# EAGLE board bubbledisplaybackpack.v01.osh (EAGLE 6.4)
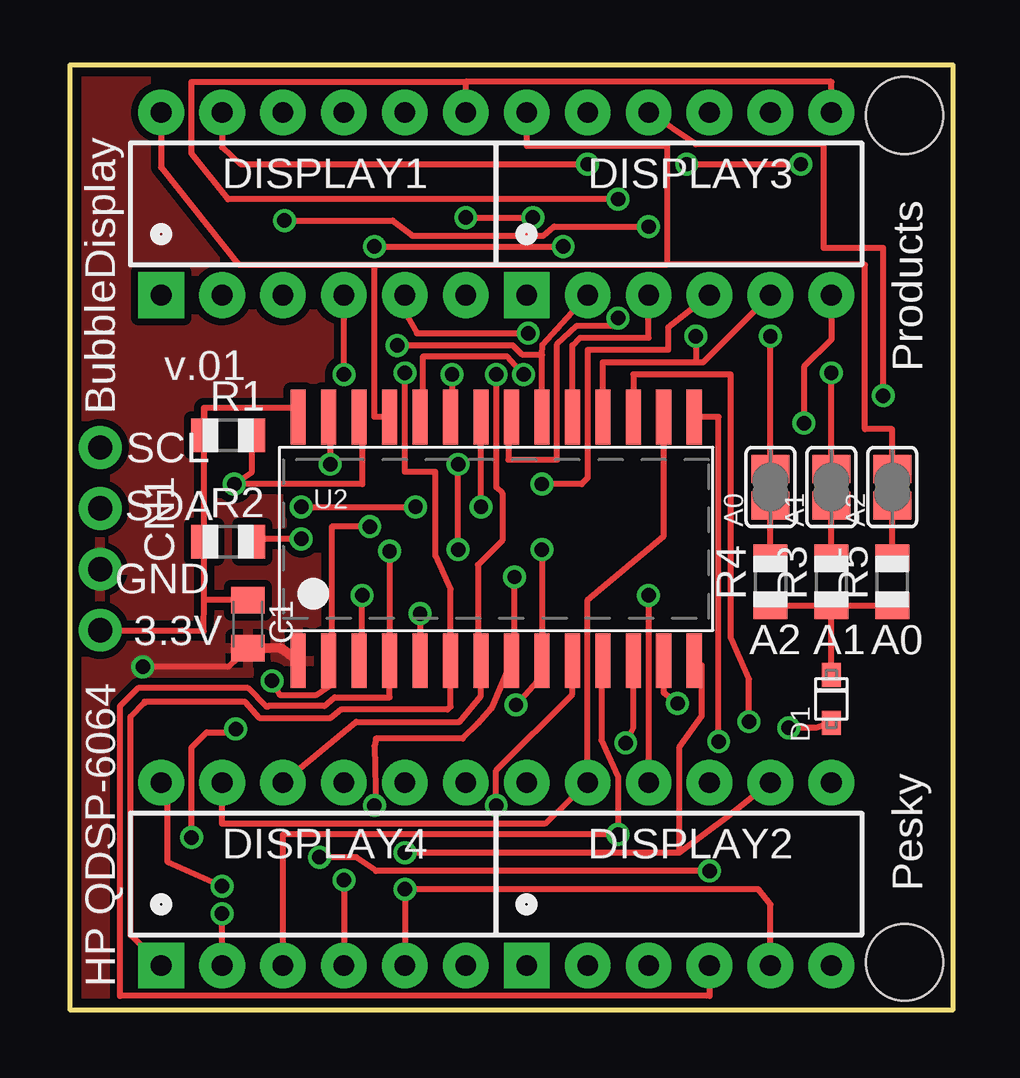
[diagram p0: board, top side]
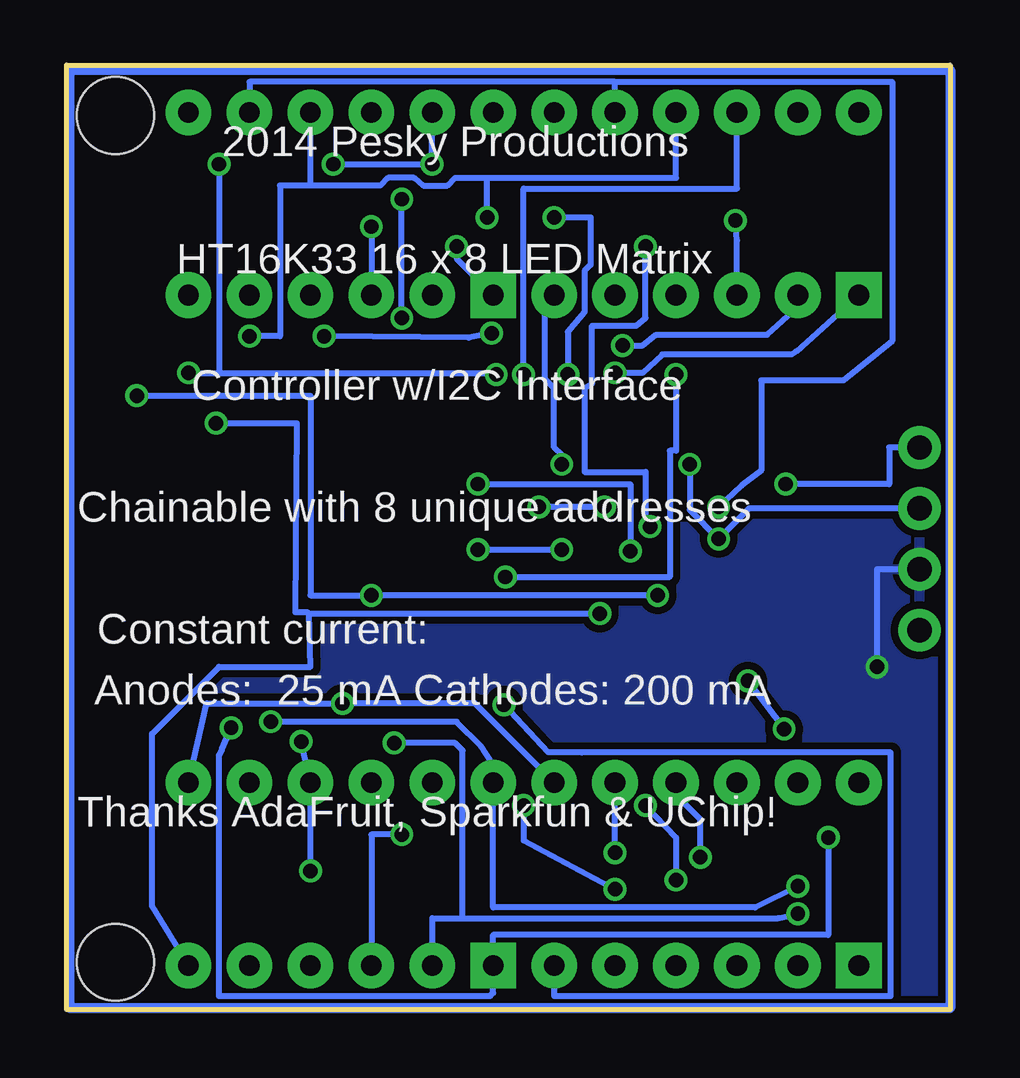
[diagram p1: board, bottom side, seen from below]

Size 36.83 x 39.37 mm. Coordinates in mm from the lower left corner, seen from the top.
Outline: 0,39.37 0,0 36.83,0 36.83,39.37 0,39.37
Copper layers (1*16): Top 0.0356mm / dielectric 1.5011mm / Bottom 0.0356mm
Design rules "OSHPark *": minimum track width 6mil, minimum drill 13mil, track to track 6mil, track to pad 6mil, pad to pad 6mil, via to via 6mil, smd to smd 6mil, copper to edge 15mil, drill to drill 6mil, minimum pad ring 7mil, minimum via ring 7mil, stop-mask expansion 3mil, vias tented up to drill 25mil, thermal gap 10mil
Holes 3.2 mm at 34.8,37.27 34.8,1.97

## Footprints (pad centres in the part's own frame; a part is rotated, then mirrored left to right if it is on the bottom)
SOLDERJUMPER_REFLOW_NOPASTE = smd 1.168 x 1.6: 1 -0.762,0; 2 0.762,0
C0805K = smd 1.1 x 1.4: 1 -1,0; 2 1,0
1X04-CLEANBIG = drill 1.016 pad 1.778: 1 -3.81,0; 2 -1.27,0; 3 1.27,0; 4 3.81,0
SOD-323F = smd 1 x 0.8: A -1,0; C 1,0
DIL12 = drill 0.864 pad 1.905 square: 1 -6.35,-3.81 | drill 0.864 pad 1.905: 2 -3.81,-3.81; 3 -1.27,-3.81; 4 1.27,-3.81; 5 3.81,-3.81; 6 6.35,-3.81; 7 6.35,3.81; 8 3.81,3.81; 9 1.27,3.81; 10 -1.27,3.81; 11 -3.81,3.81; 12 -6.35,3.81
R0805 = smd 1.1 x 1.4: 1 -1,0; 2 1,0
SOP28_300MIL = smd 0.635 x 2.286: P$1 -8.255,-5.08; P$2 -6.985,-5.08; P$3 -5.715,-5.08; P$4 -4.445,-5.08; P$5 -3.175,-5.08; P$6 -1.905,-5.08; P$7 -0.635,-5.08; P$8 0.635,-5.08; P$9 1.905,-5.08; P$10 3.175,-5.08; P$11 4.445,-5.08; P$12 5.715,-5.08; P$13 6.985,-5.08; P$14 8.255,-5.08; P$15 8.255,5.08; P$16 6.985,5.08; P$17 5.715,5.08; P$18 4.445,5.08; P$19 3.175,5.08; P$20 1.905,5.08; P$21 0.635,5.08; P$22 -0.635,5.08; P$23 -1.905,5.08; P$24 -3.175,5.08; P$25 -4.445,5.08; P$26 -5.715,5.08; P$27 -6.985,5.08; P$28 -8.255,5.08

## Placement (x,y rotation side)
A0  [SOLDERJUMPER_REFLOW_NOPASTE]  29.21,21.78 90 top
A1  [SOLDERJUMPER_REFLOW_NOPASTE]  31.75,21.78 90 top
A2  [SOLDERJUMPER_REFLOW_NOPASTE]  34.29,21.78 90 top
C1  10uF  [C0805K]  7.43,16.07 270 top
CN1  1X4-CLEANBIG  [1X04-CLEANBIG]  1.27,19.62 270 top
D1  1N4148  [SOD-323F]  31.75,12.95 90 top
DISPLAY1  hp  [DIL12]  10.16,33.59 0 top
DISPLAY2  hp  [DIL12]  25.4,5.65 0 top
DISPLAY3  hp  [DIL12]  25.4,33.59 0 top
DISPLAY4  hp  [DIL12]  10.16,5.65 0 top
FRAME1  FRAME-LEDGER  [CREATIVE_COMMONS]  -26.67,-7.62 0 top  (outside the outline)
R1  10K  [R0805]  6.6,23.94 0 top
R2  10K  [R0805]  6.6,19.49 0 top
R3  47K  [R0805]  31.75,17.84 90 top
R4  47K  [R0805]  29.21,17.84 90 top
R5  47K  [R0805]  34.29,17.84 90 top
U2  [SOP28_300MIL]  17.78,19.62 0 top

## Library data of the parts
A0 A1 A2 U2 = microbuilder
C1 CN1 D1 R1-R5 = adafruit
DISPLAY1-DISPLAY4 = SparkFun-Displays
FRAME1 = SparkFun-Aesthetics

## Nets
A0: A0.2 DISPLAY1.9 DISPLAY3.9 U2.P$23
A1: A1.2 DISPLAY1.11 DISPLAY3.11 U2.P$24
A2: A2.2 DISPLAY1.12 DISPLAY3.12 U2.P$25
C0P1: D1.A DISPLAY2.1 DISPLAY3.1 U2.P$2
C1P10: DISPLAY2.10 DISPLAY3.10 U2.P$3
C2P4: DISPLAY2.4 DISPLAY3.4 U2.P$4
C3P6: DISPLAY2.6 DISPLAY3.6 U2.P$5
C4P1: DISPLAY1.1 DISPLAY4.1 U2.P$6
C5P10: DISPLAY1.10 DISPLAY4.10 U2.P$7
C6P4: DISPLAY1.4 DISPLAY4.4 U2.P$8
C7P6: DISPLAY1.6 DISPLAY4.6 U2.P$9
GND: C1.2 CN1.3 U2.P$1
N$1: D1.C R3.1 R4.1 R5.1
N$3: DISPLAY1.8 DISPLAY3.8 U2.P$22
N$5: DISPLAY2.9 DISPLAY4.9 U2.P$15
N$7: A2.1 R5.2
N$8: DISPLAY2.2 DISPLAY4.2 U2.P$12
N$19: A1.1 R3.2
N$20: A0.1 R4.2
SCL: CN1.1 R1.2 U2.P$26
SDA: CN1.2 R2.2 U2.P$27
SEGAD24P12: DISPLAY2.12 DISPLAY4.12 U2.P$17
SEGBD24P11: DISPLAY2.11 DISPLAY4.11 U2.P$16
SEGCP3: DISPLAY2.3 DISPLAY4.3 U2.P$11
SEGD13EP2: DISPLAY1.7 DISPLAY3.7 U2.P$21
SEGD13GP7: DISPLAY1.3 DISPLAY3.3 U2.P$19
SEGDD24P8: DISPLAY2.8 DISPLAY4.8 U2.P$14
SEGDPD13P5: DISPLAY1.5 DISPLAY3.5 U2.P$18
SEGDPP5: DISPLAY2.5 DISPLAY4.5 U2.P$10
SEGED13P2: DISPLAY1.2 DISPLAY3.2 U2.P$20
SEGFP9: DISPLAY2.7 DISPLAY4.7 U2.P$13
VDD: C1.1 CN1.4 R1.1 R2.1 U2.P$28

## Tracks (layer width: path | path; a pad name or v marks a point on that pad's centre or on a via)
A0  (via drill 0.6)
  Top 0.254: A0.2 v29.21,28.07 | U2.P$23 16,24.7 v15.94,26.48 | v16.51,33.02 v19.3,33.02
  Bottom 0.254: 26.67,34.35 DISPLAY3.9 | DISPLAY1.9 11.43,34.67 19.3,34.67 | v16.51,33.02 14.99,33.02 14.99,31.05 15.24,30.8 15.24,29.08 15.94,28.26 v15.94,26.48 | v19.3,33.02 19.3,34.67 | 26.67,34.35 27.94,34.35 27.94,28.07 v29.21,28.07 | 19.3,34.67 20.64,34.67 20.95,34.35 21.97,34.35 22.35,34.67 23.43,34.67 23.75,34.35 26.67,34.35
A1  (via drill 0.6)
  Top 0.254: A1.2 v31.75,26.54 | U2.P$24 14.73,24.7 14.73,27.24 18.22,27.24 v18.92,26.48 | DISPLAY1.11 6.35,35.94 7.11,35.24 v21.59,35.24 | v25.72,35.24 v30.48,35.24
  Bottom 0.254: DISPLAY3.11 v21.59,35.24 v25.72,35.24 | v18.92,26.48 18.92,26.54 30.48,26.54 | v31.75,26.54 30.48,26.54 | v30.48,35.24 30.48,26.54
A2
  Top 0.254: 24.89,31.05 33.15,31.05 33.15,24.19 34.29,24.19 A2.2 | U2.P$25 12.7,24.7 12.7,31.05 | 12.7,31.05 24.89,31.05 | DISPLAY1.12 3.81,35.12 7.05,31.05 12.7,31.05 | DISPLAY3.12 19.05,36.01 24.89,36.01 24.89,31.05
C0P1  (via drill 0.6)
  Top 0.254: v12.51,20.13 10.92,20.13 10.92,15.3 10.79,15.18 U2.P$2 10.85,14.43 10.85,13.51 10.25,13.11 8.78,13.11 v8.43,13.7 | D1.A 31.11,11.75 v29.97,11.75 | v12.7,31.81 v20.57,31.81 | v5.08,7.18 5.08,10.92 5.71,11.56 6.78,11.56 v6.92,11.7
  Bottom 0.254: v8.43,13.7 v6.92,11.7 | v5.08,7.18 5.08,3.11 19.05,3.11 DISPLAY2.1 19.05,0.7 19.18,0.57 30.48,0.57 30.48,10.6 30.35,10.86 v29.97,11.75 | v12.51,20.13 12.7,20.13 12.7,22.42 15.24,22.42 15.24,25.91 14.92,26.1 14.92,28.51 13.08,28.51 12.7,28.83 v12.7,31.81 | v20.57,31.81 20.57,31.3 DISPLAY3.1
C1P10  (via drill 0.6)
  Top 0.254: v24.13,17.27 DISPLAY2.10 | DISPLAY3.10 26.1,36.07 31.43,36.07 31.43,31.75 33.91,31.75 v33.91,25.59 | U2.P$3 12.19,14.67 v12.19,17.27
  Bottom 0.254: v33.91,25.59 26.67,25.59 26.67,17.27 v24.13,17.27 v12.19,17.27
C2P4  (via drill 0.6)
  Top 0.254: v19.68,21.91 21.34,21.91 21.59,22.16 21.59,27.5 24.96,27.5 24.96,28.45 DISPLAY3.4 | v13.34,19.11 U2.P$4 13.34,13.02 11.05,13.02 10.62,12.65 8.27,12.65 8.26,12.64 8.19,12.64 7.43,13.4 2.85,13.4 2.1,12.65 2.1,0.57 26.67,0.57 DISPLAY2.4
  Bottom 0.254: v19.68,21.91 13.34,21.91 v13.34,19.11
C3P6  (via drill 0.6)
  Top 0.254: v14.61,16.51 U2.P$5 | DISPLAY3.6 31.75,27.94 30.61,26.8 v30.61,24.45
  Bottom 0.254: DISPLAY2.6 33.27,4.32 33.27,11.49 30.48,14.29 26.67,14.29 26.73,16.51 | 26.73,16.51 v14.61,16.51 | 26.73,16.51 26.8,16.57 27.3,16.57 27.24,24.45 v30.61,24.45
C4P1  (via drill 0.6)
  Top 0.254: v13.97,26.54 13.97,22.42 15.24,22.42 15.24,18.92 15.88,17.53 U2.P$6 15.88,12.64 15.75,12.51 11.3,12.51 10.86,12.14 7.92,12.14 7.3,12.83 3.11,12.83 3.11,12.78 2.54,12.21 2.54,3.11 DISPLAY4.1
  Bottom 0.254: DISPLAY1.1 6.41,27.43 6.6,27.3 12,27.3 12.83,26.54 v13.97,26.54
C5P10  (via drill 0.6)
  Top 0.254: DISPLAY4.10 11.94,12 16.26,12 17.14,13.08 U2.P$7 17.02,14.67 17.02,18.54 18.03,19.56 18.03,21.53 17.78,21.78 v17.78,26.48
  Bottom 0.254: v17.78,26.48 17.78,34.23 8.89,34.23 DISPLAY1.10
C6P4  (via drill 0.6)
  Top 0.254: v11.43,5.4 DISPLAY4.4 | v11.43,26.48 DISPLAY1.4 | v12.7,8.51 12.76,8.32 12.7,10.99 12.76,11.3 16.38,11.3 17.02,11.94 17.59,12.57 U2.P$8 18.54,14.67 v18.54,18.03
  Bottom 0.254: v12.7,8.51 11.43,7.18 v11.43,5.4 | v18.54,18.03 11.68,18.03 11.68,23.3 11.43,23.3 v11.43,26.48
C7P6  (via drill 0.6)
  Top 0.254: U2.P$9 19.81,14.67 | v16.19,19.18 v16.19,22.73 | v18.61,12.7 19.68,13.91 U2.P$9 | v19.68,19.18 U2.P$9
  Bottom 0.254: v19.68,19.18 v16.19,19.18 | DISPLAY4.6 16.51,0.57 2.48,0.57 2.48,10.72 15.37,10.72 16.76,10.73 v18.61,12.7 | v16.19,22.73 16.19,23.11 16.51,23.43 16.51,25.91 16.89,26.29 16.89,29.4 DISPLAY1.6
GND  (via drill 0.6)
  Top 0.254: C1.2 6.6,14.29 v3.05,14.29
  Top 0.406: U2.P$1 8.83,15.05 C1.2
  Bottom 0.254: CN1.3 3.05,18.35 v3.05,14.29
  pour Top (isolate 0.305): -0.06,39.37 -0.06,0.19 0.06,0.06 36.58,0.06 36.7,0.19 36.7,39.05 36.77,39.24
  pour Bottom (isolate 0.305): 0.06,39.37 0.06,0.13 0,0.06 36.64,0.06 36.7,0.13 36.7,39.18 36.64,39.24 0.19,39.24 0.13,39.31
N$1
  Top 0.254: D1.C R3.1 | R4.1 R3.1 | R3.1 R5.1
N$3  (via drill 0.6)
  Top 0.254: v9.65,20.95 v14.41,20.95 | v17.14,20.95 U2.P$22
  Bottom 0.254: DISPLAY1.8 13.97,38.67 | 13.97,38.67 29.21,38.67 DISPLAY3.8 | 13.97,38.67 2.41,38.67 2.41,27.88 4.45,26.23 7.87,26.23 7.87,22.48 8.7,21.84 v9.65,20.95 | v14.41,20.95 v17.14,20.95
N$4
  Bottom 0.406: 0,39.18 0,0.06 36.7,0.06 36.7,39.18 0,39.18
N$5  (via drill 0.6)
  Top 0.254: v27.05,11.18 27.05,24.7 U2.P$15 | v26.67,5.78 12.76,5.78 11.94,6.35 v10.41,6.35
  Bottom 0.254: v27.05,11.18 DISPLAY2.9 v26.67,5.78 | v10.41,6.35 10.41,7.94 11.43,8.95 DISPLAY4.9
N$7
  Top 0.254: R5.2 A2.1
N$8  (via drill 0.6)
  Top 0.254: DISPLAY4.2 v6.35,4 | v23.18,11.11 23.5,11.75 U2.P$12
  Bottom 0.254: DISPLAY2.2 21.59,3.81 20.32,3.81 | 20.32,3.81 20.32,10.79 20.64,11.11 v23.18,11.11 | 20.32,3.81 7.18,3.81 v6.35,4
N$19
  Top 0.254: R3.2 A1.1
N$20
  Top 0.254: R4.2 A0.1
SCL  (via drill 0.6)
  Top 0.254: R1.2 7.6,22.42 v6.86,21.91 12.19,21.91 12.19,24.57 | 12.19,24.57 12.19,24.7 U2.P$26 12.19,24.57
  Bottom 0.254: CN1.1 2.54,23.43 2.54,21.91 v6.86,21.91
SDA  (via drill 0.6)
  Top 0.254: v9.65,19.62 7.87,19.62 R2.2 | U2.P$27 10.67,24.7 10.67,24.45 10.86,24.45 v10.86,22.73
  Bottom 0.254: CN1.2 8.38,20.89 v9.65,19.62 10.86,20.83 v10.86,22.73
SEGAD24P12  (via drill 0.6)
  Top 0.254: DISPLAY4.12 4.06,9.21 4.06,6.16 v6.35,5.14 | v28.32,12 28.32,13.78 27.56,15.49 27.56,26.48 23.5,26.48 U2.P$17
  Bottom 0.254: v28.32,12 20.57,12 19.56,10.99 19.05,10.22 DISPLAY2.12 19.05,4.25 8.13,4.25 v6.35,5.14
SEGBD24P11
  Top 0.254: U2.P$16 24.77,19.75 21.59,17.08 DISPLAY2.11 19.81,7.75 6.35,7.75 DISPLAY4.11
SEGCP3  (via drill 0.6)
  Top 0.254: DISPLAY4.3 8.89,7.3 v22.86,7.3 22.86,9.72 22.16,11.24 22.16,14.48 U2.P$11
  Bottom 0.254: v22.86,7.3 24.13,7.3 DISPLAY2.3
SEGD13EP2  (via drill 0.6)
  Top 0.254: DISPLAY3.7 31.75,38.67 16.51,38.67 | 16.51,38.67 DISPLAY1.7 | U2.P$21 18.29,24.57 18.29,22.92 20.32,22.92 20.32,27.75 21.14,28.51 22.86,28.51 v22.86,28.83 22.86,29.02 | v22.86,33.78 6.6,33.78 5.08,35.69 5.08,38.67 16.51,38.67
  Bottom 0.254: v22.86,28.83 v22.86,33.78
SEGD13GP7  (via drill 0.6)
  Top 0.254: U2.P$19 20.95,27.69 21.27,28 24.13,28 DISPLAY3.3 | v8.95,32.89 13.46,32.89 14.29,32.26 19.75,32.26 20.19,32.64 v24.13,32.64
  Bottom 0.254: DISPLAY1.3 8.89,32.07 v8.95,32.89 | v24.13,32.64 DISPLAY3.3
SEGDD24P8  (via drill 0.6)
  Top 0.254: 25.4,6.54 25.4,10.92 26.35,12.26 26.35,14.35 U2.P$14 | 25.4,6.54 v13.97,6.54 | 25.4,6.54 27.43,8.06 DISPLAY2.8
  Bottom 0.254: v13.97,6.54 DISPLAY4.8
SEGDPD13P5  (via drill 0.6)
  Top 0.254: U2.P$18 22.23,26.99 26.1,26.99 | 26.1,26.99 26.42,26.99 DISPLAY3.5 | DISPLAY1.5 13.97,29.08 14.48,28.19 v19.11,28.19 | v26.1,28.07 26.1,26.99
  Bottom 0.254: v19.11,28.19 20.07,28 v26.1,28.07
SEGDPP5  (via drill 0.6)
  Top 0.254: 21.02,13.63 U2.P$10 20.95,13.14 17.78,9.97 v17.78,8.51 | DISPLAY4.5 v13.97,5.02 28.7,5.02 29.21,4.38 DISPLAY2.5
  Bottom 0.254: v17.78,8.51 17.78,7.05 v13.97,5.02
SEGED13P2  (via drill 0.6)
  Top 0.254: v13.65,27.69 18.48,27.69 18.86,27.3 19.68,27.3 19.69,27.29 | DISPLAY3.2 20.32,28.38 19.7,27.71 19.69,27.29 | U2.P$20 19.68,26.92 19.69,27.29
  Bottom 0.254: DISPLAY1.2 6.35,29.27 7.62,28.13 12.26,28.13 12.83,27.69 v13.65,27.69
SEGFP9  (via drill 0.6)
  Top 0.254: v25.34,12.76 24.77,13.21 U2.P$13
  Bottom 0.254: DISPLAY4.7 19.81,12.76 v25.34,12.76 30.99,12.76 DISPLAY2.7
VDD
  Top 0.254: C1.1 5.6,17.07 | 5.6,17.07 R2.1 R1.1 5.6,25.08 | 5.6,17.07 5.59,15.78 4.7,15.81 CN1.4 | U2.P$28 9.53,25.08 5.6,25.08 | 5.59,23.94 5.6,25.08

## Text on the board
tPlace: Products | v.01 | BubbleDisplay | SCL | SDA | GND | 3.3V | A2 | A1 | A0 | Pesky | HP QDSP-6064
bPlace: 2014 Pesky Productions | HT16K33 16 x 8 LED Matrix | Controller w/I2C Interface | Chainable with 8 unique addresses | Constant current: | Anodes: 25 mA Cathodes: 200 mA | Thanks AdaFruit, Sparkfun & UChip!